# Altium PCB PowerPCB1.PcbDoc (part 1 of 2)
Units mm, origin at the board's own origin, x right, y up, seen from the top; angles counter-clockwise.
Board outline 99.06 x 99.06 mm, 2 copper layers (Top Layer, Bottom Layer); 136 components, 79 nets, 365 pads, 730 vias.
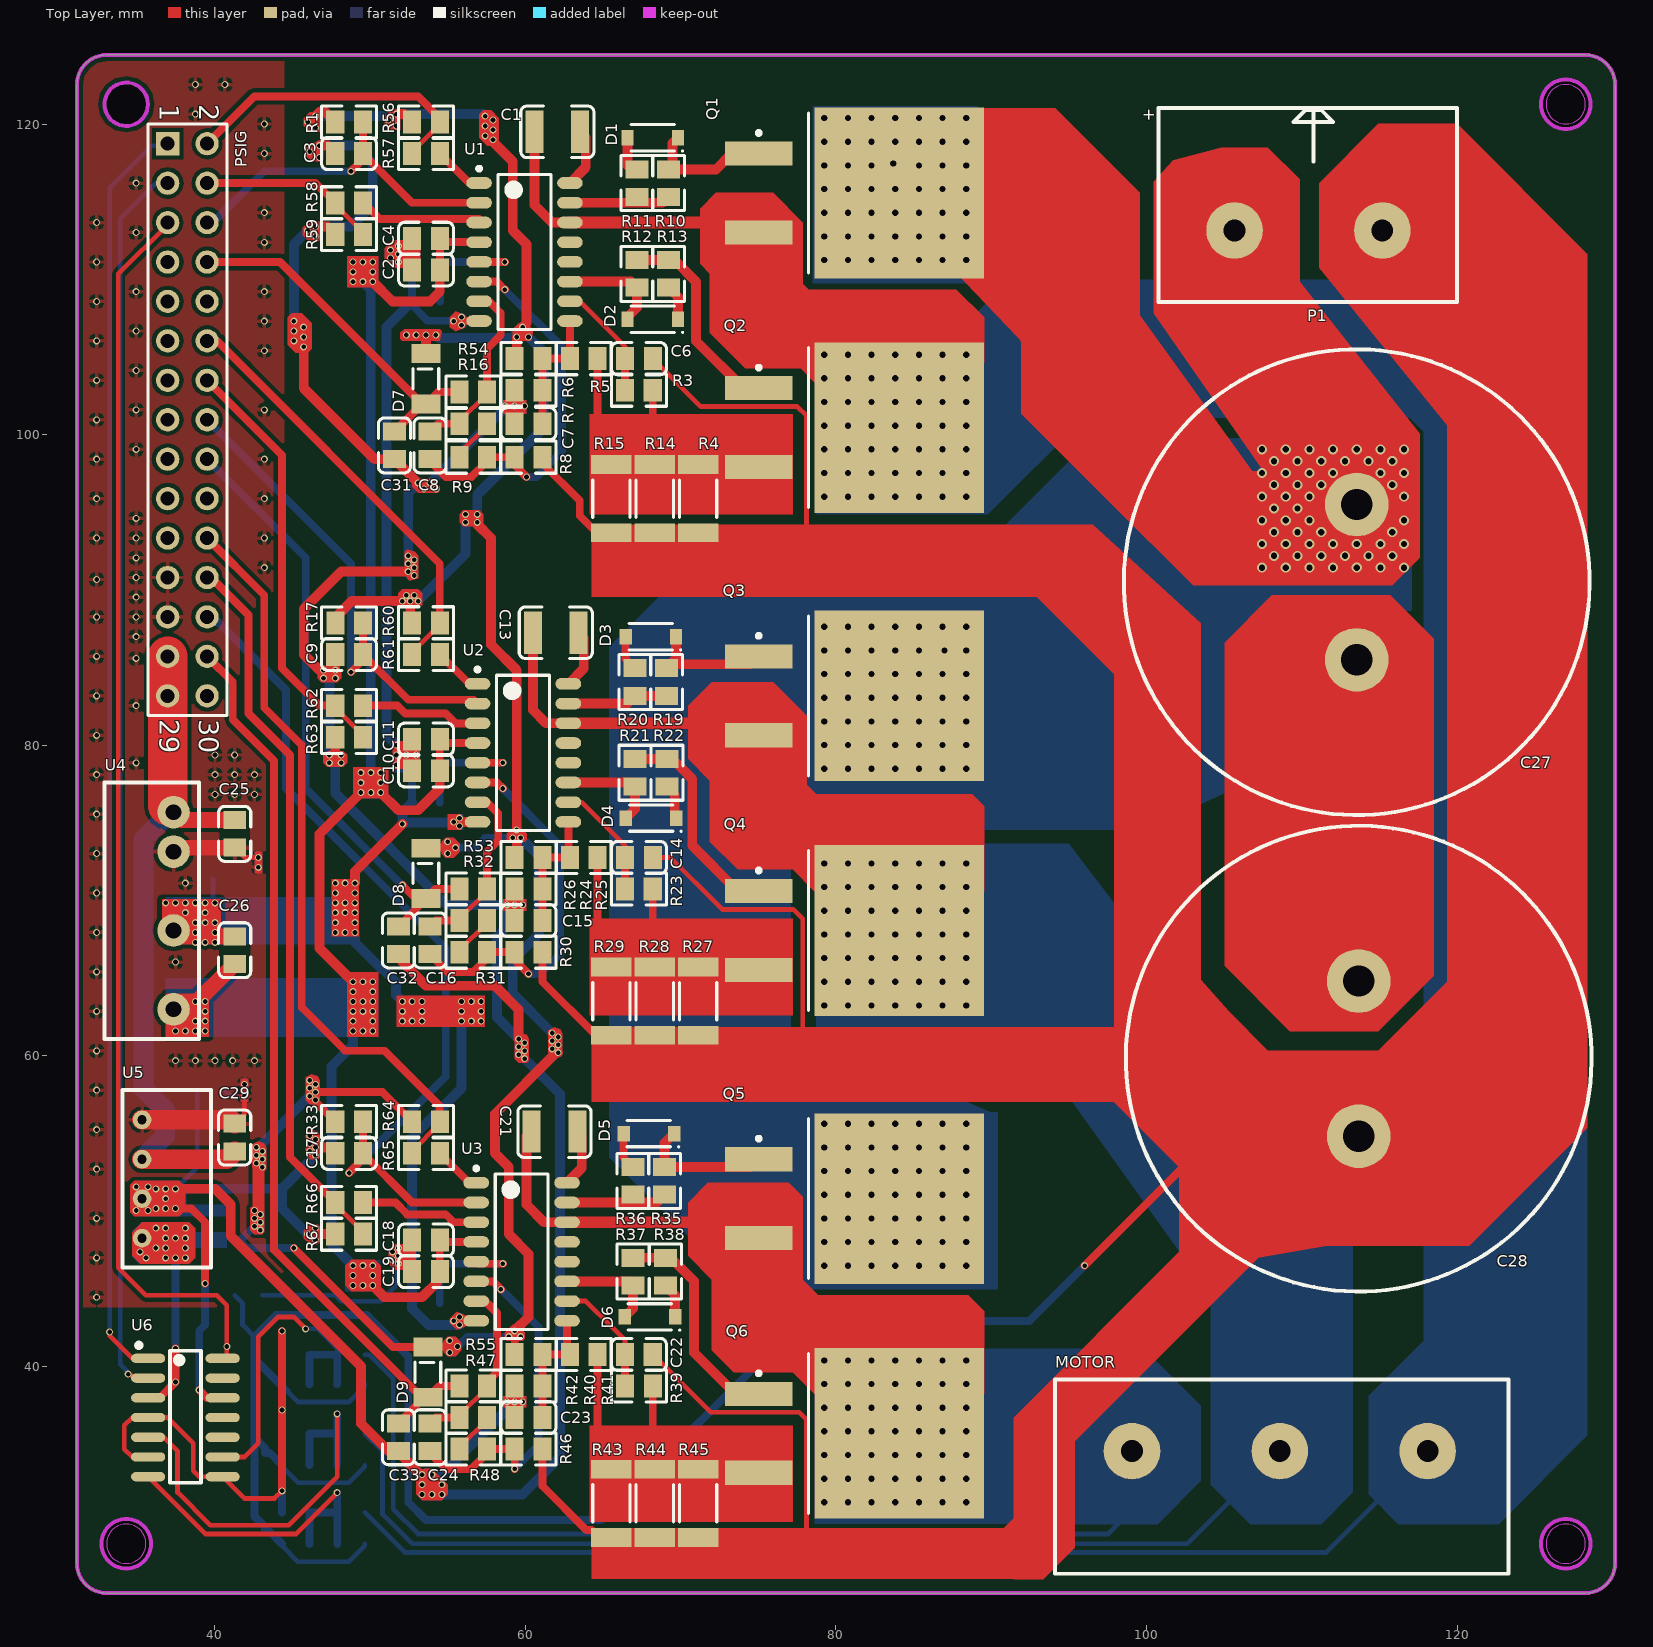
[diagram p0: Top Layer view]
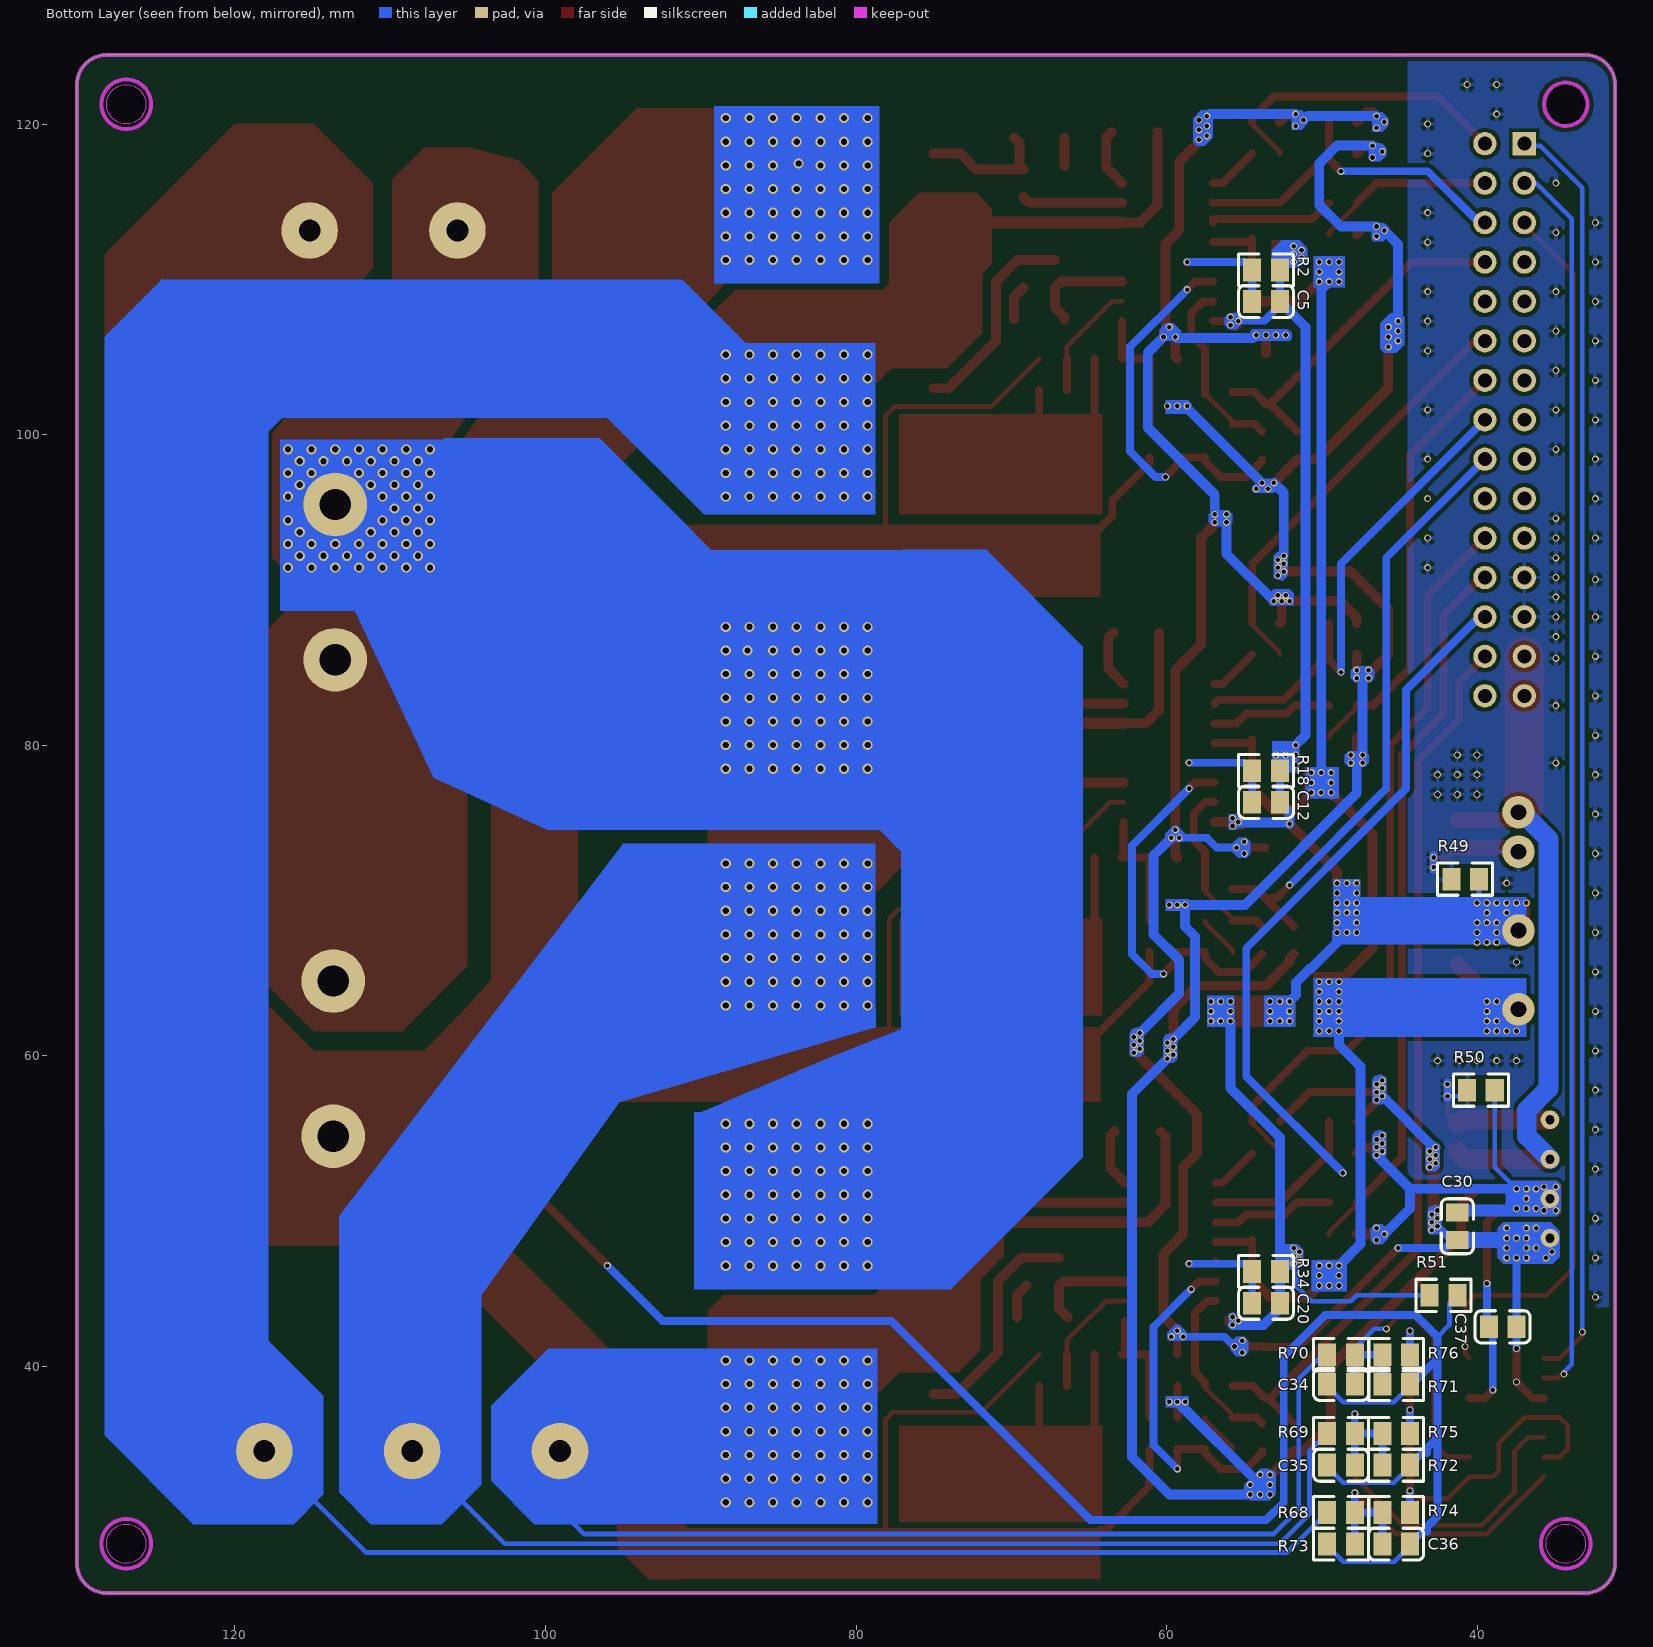
[diagram p1: Bottom Layer view, seen from below]
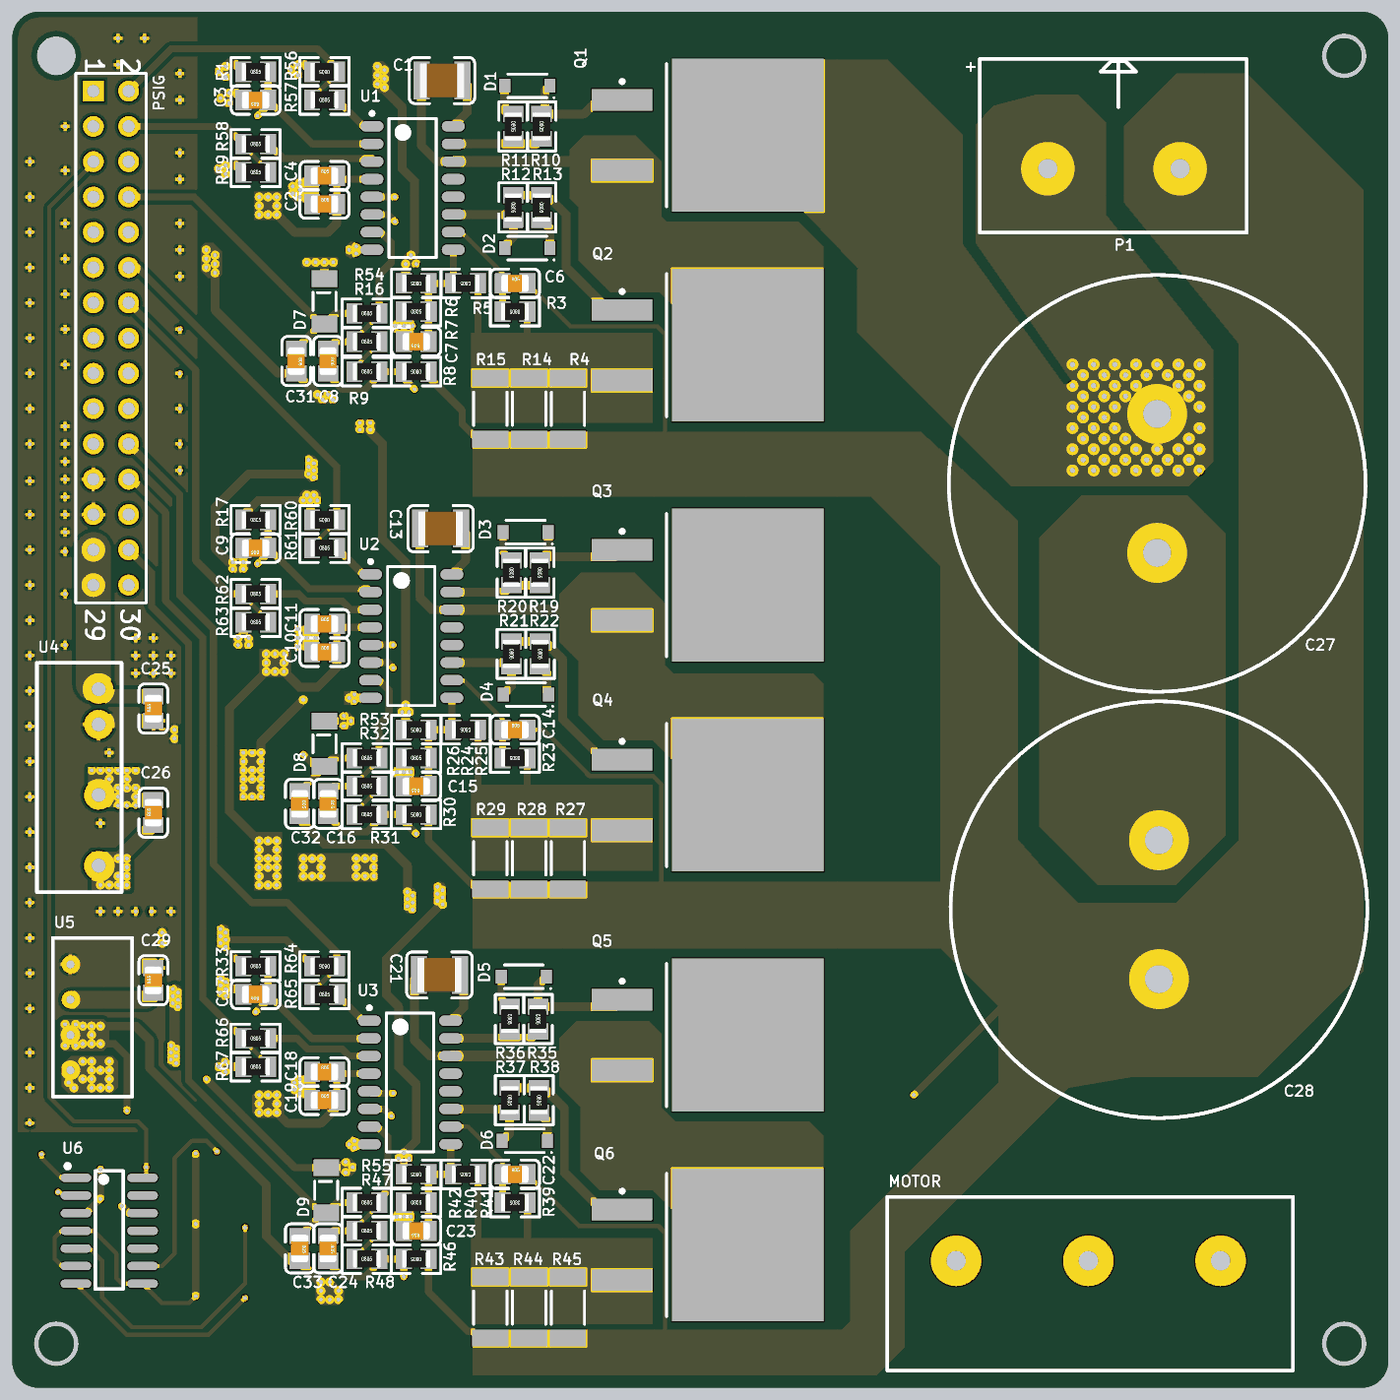
[diagram p3: 3D render of the assembled board from above, using the file's embedded part models]
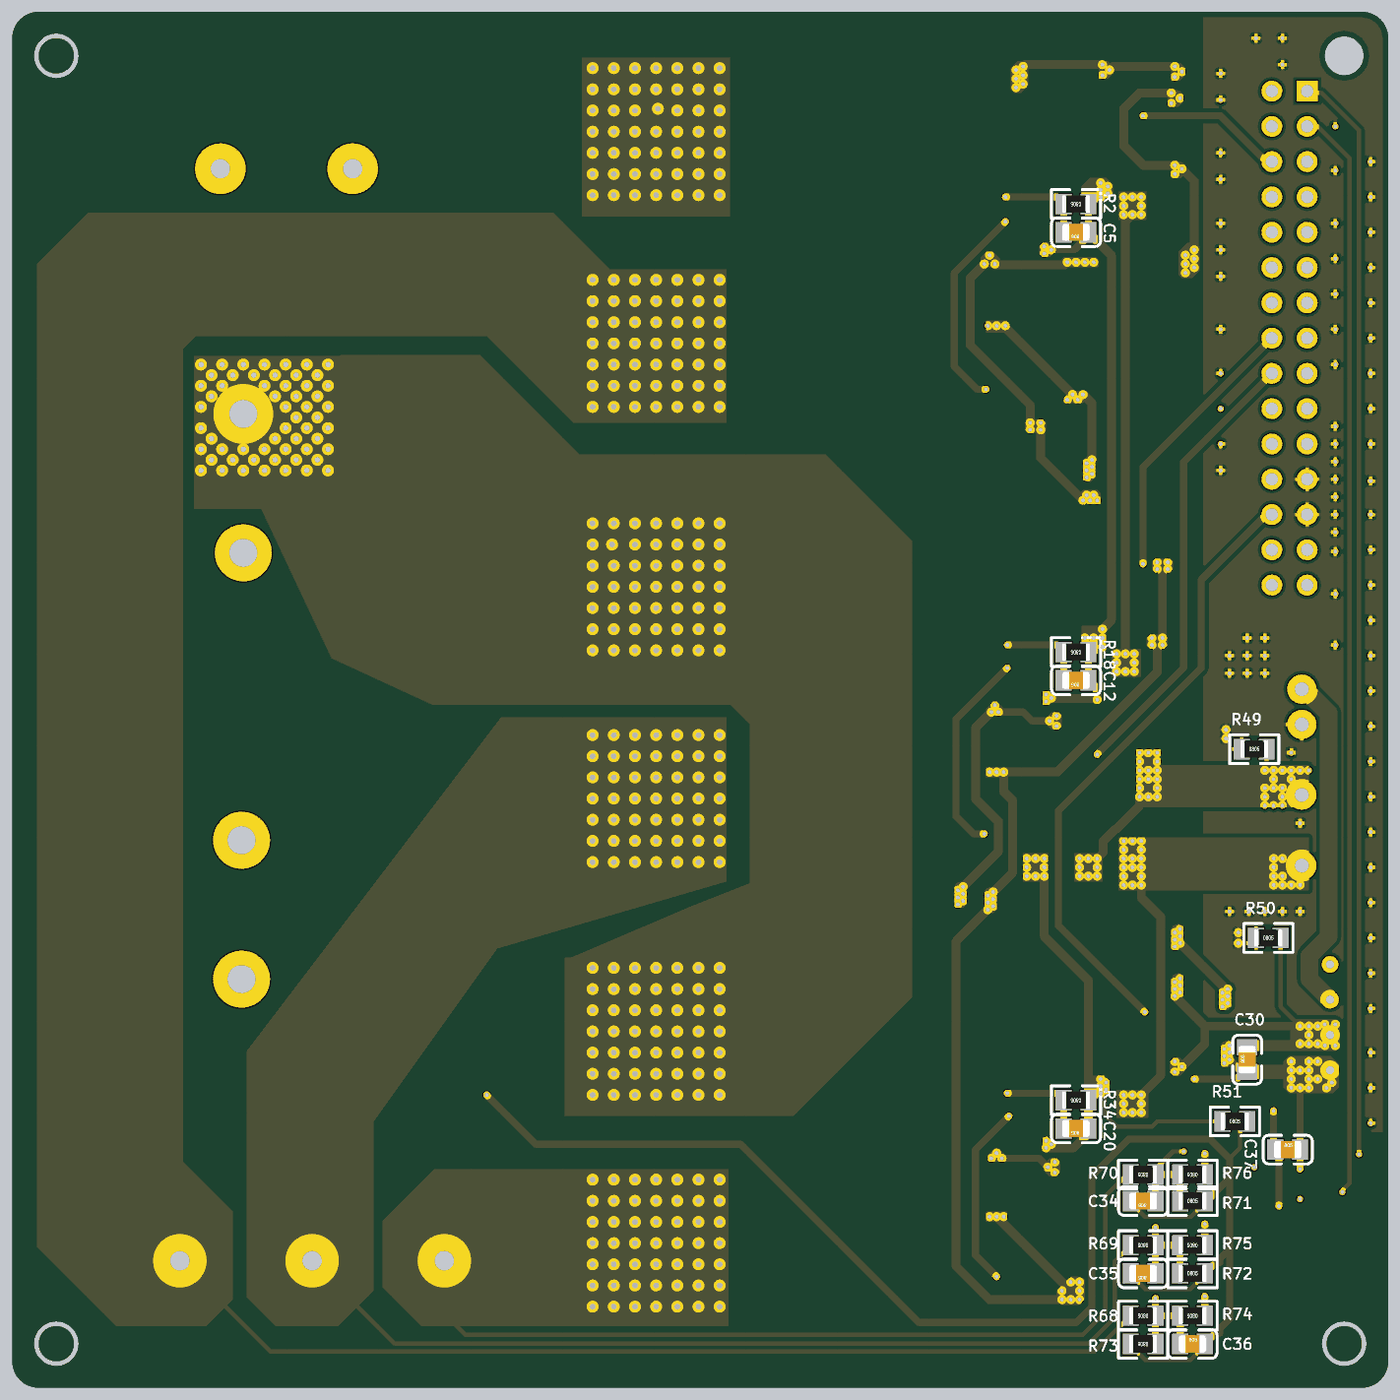
[diagram p4: 3D render of the assembled board from below, using the file's embedded part models]

## Layer stack, top to bottom
Top Solder: solder mask 0.0102, Solder Resist, Dk 3.5
Top Layer: signal copper 0.0356
Dielectric 1: dielectric 0.32, FR-4, Dk 4.8
Bottom Layer: signal copper 0.0356
Bottom Solder: solder mask 0.0102, Solder Resist, Dk 3.5

## Board outline
31.115,27.305 ccw(c33.02,27.305) 33.02,25.4 128.27,25.4 ccw(c128.27,27.305) 130.175,27.305 130.175,122.555 ccw(c128.27,122.555) 128.27,124.46 33.02,124.46 ccw(c33.02,122.555) 31.115,122.555
cut-out: 125.73,28.575 ccw(c127,28.575) 127,27.305 ccw(c127,28.575) 128.27,28.575 ccw(c127,28.575) 127,29.845 ccw(c127,28.575)
cut-out: 125.73,121.285 ccw(c127,121.285) 127,120.015 ccw(c127,121.285) 128.27,121.285 ccw(c127,121.285) 127,122.555 ccw(c127,121.285)
cut-out: 33.02,28.575 ccw(c34.29,28.575) 34.29,27.305 ccw(c34.29,28.575) 35.56,28.575 ccw(c34.29,28.575) 34.29,29.845 ccw(c34.29,28.575)
cut-out: 34.29,119.888 cw(c34.29,121.285) 32.893,121.285 cw(c34.29,121.285) 34.29,122.682 cw(c34.29,121.285) 35.687,121.285 cw(c34.29,121.285)
cut-out: 32.69,28.575 ccw(c34.29,28.575) 34.29,26.975 ccw(c34.29,28.575) 35.89,28.575 ccw(c34.29,28.575) 34.29,30.175 ccw(c34.29,28.575)
cut-out: 125.4,28.575 ccw(c127,28.575) 127,26.975 ccw(c127,28.575) 128.6,28.575 ccw(c127,28.575) 127,30.175 ccw(c127,28.575)
cut-out: 125.4,121.285 ccw(c127,121.285) 127,119.685 ccw(c127,121.285) 128.6,121.285 ccw(c127,121.285) 127,122.885 ccw(c127,121.285)

## Design rules (kind name [scope] priority, off if disabled: settings)
Clearance [All] p1: gap=0.254 ignorepadtopadclearanceinfootprint=FALSE except(0: Arc-Hole Track-Hole SMDPad-Hole THPad-Hole Via-Hole Fill-Hole Poly-Hole Region-Hole Text-Hole)
ComponentClearance [All] p1 off: gap=0.254 collisioncheckmode=3 verticalgap=0.254 showdistances=FALSE
PolygonConnect [All] p1: connectstyle=Relief reliefconductorwidth=0.254 reliefentries=4 polygonreliefangle="90 Angle" airgapwidth=0.254
RoutingVias [All] p1: holewidth=0.711 width=1.27 viastyle="Through Hole" minholewidth=0.711 minwidth=1.27 maxholewidth=0.711 maxwidth=1.27
SilkToSilkClearance [All] p1: silktosilkclearance=0
SilkToSolderMaskClearance [IsPad] p1: minsilkscreentomaskgap=0.127 clearancetoexposedcopper=TRUE
SolderMaskExpansion [All] p1: expansion=0.102
Width [All] p1: maxlimit=2.54 minlimit=0.254 preferedwidth=0.254
27 further rules are at their usual default settings.

## Components (designator, comment, footprint, x,y, rotation, side; value= is the part's Value field where it differs from the comment)
C1 "Cap Semi" LC-1210_C 62.054,119.507 r0 top value=100nF
C2 "Cap Semi" LC-0805_C 53.595,110.617 r0 top value=100nF
C3 "Cap Semi" LC-0805_C 48.64,118.11 r180 top value=22nF
C4 "Cap Semi" LC-0805_C 53.595,112.649 r0 top value=10uF
C5 "Cap Semi" LC-0805_C 53.595,108.585 r0 bottom value=100nF
C6 "Cap Semi" LC-0805_C 67.31,104.902 r0 top value=100nF
C7 "Cap Semi" LC-0805_C 60.197,100.711 r180 top value=33pF
C8 "Cap Semi" LC-0805_C 53.848,99.314 r270 top value=47pF
C9 "Cap Semi" LC-0805_C 48.64,85.852 r180 top value=22nF
C10 "Cap Semi" LC-0805_C 53.593,78.359 r0 top value=100nF
C11 "Cap Semi" LC-0805_C 53.594,80.391 r0 top value=10uF
C12 "Cap Semi" LC-0805_C 53.593,76.327 r0 bottom value=100nF
C13 "Cap Semi" LC-1210_C 61.953,87.249 r0 top value=100nF
C14 "Cap Semi" LC-0805_C 67.31,72.771 r0 top value=100nF
C15 "Cap Semi" LC-0805_C 60.197,68.707 r180 top value=33pF
C16 "Cap Semi" LC-0805_C 53.848,67.437 r270 top value=47pF
C17 "Cap Semi" LC-0805_C 48.64,53.721 r180 top value=22nF
C18 "Cap Semi" LC-0805_C 53.594,48.133 r0 top value=100nF
C19 "Cap Semi" LC-0805_C 53.594,46.101 r0 top value=10uF
C20 "Cap Semi" LC-0805_C 53.594,44.069 r0 bottom value=100nF
C21 "Cap Semi" LC-1210_C 61.867,55.118 r0 top value=100nF
C22 "Cap Semi" LC-0805_C 67.309,40.767 r0 top value=100nF
C23 "Cap Semi" LC-0805_C 60.197,36.703 r180 top value=33pF
C24 "Cap Semi" LC-0805_C 53.848,35.434 r270 top value=47pF
C25 "Cap Semi" LC-0805_C 41.275,74.296 r90 top value=10uF
C26 "Cap Semi" LC-0805_C 41.275,66.803 r90 top value=1uF
C27 "Cap Pol1" CAPACITORS 113.538,90.504 r270 top value=470uF
C28 "Cap Pol1" CAPACITORS 113.665,59.817 r270 top value=470uF
C29 "Cap Semi" LC-0805_C 41.275,54.736 r90 top value=4.7uF
C30 "Cap Semi" LC-0805_C 41.275,49.022 r90 bottom value=10uF
C31 "Cap Semi" LC-0805_C 51.562,99.314 r270 top value=22pF
C32 "Cap Semi" LC-0805_C 51.816,67.438 r270 top value=22pF
C33 "Cap Semi" LC-0805_C 51.816,35.434 r270 top value=22pF
C34 "Cap Semi" LC-0805_C 48.765,38.845 r0 bottom value=100nF
C35 "Cap Semi" LC-0805_C 48.767,33.638 r0 bottom value=100nF
C36 "Cap Semi" LC-0805_C 45.212,28.558 r180 bottom value=100nF
C37 "Cap Semi" LC-0805_C 38.354,42.545 r180 bottom value=100nF
D1 "1N4148W" SOD-123-D-IPC 68.199,119.126 r180 top
D2 "1N4148W" SOD-123-D-IPC 68.199,107.442 r180 top
D3 "1N4148W" SOD-123-D-IPC 68.072,86.995 r180 top
D4 "1N4148W" SOD-123-D-IPC 68.098,75.311 r180 top
D5 "1N4148W" SOD-123-D-IPC 67.945,54.991 r180 top
D6 "1N4148W" SOD-123-D-IPC 68.012,43.18 r180 top
D7 "D Schottky" MELF3416N 53.594,103.606 r90 top
D8 "D Schottky" MELF3416N 53.594,71.755 r90 top
D9 "D Schottky" MELF3416N 53.721,39.624 r90 top
MOTOR "Header 3" MKDS5/3-9.5 99.065,34.544 r0 top
P1 "DCBus" "MKDS5/2-9.5 - duplicate" 115.189,113.157 r180 top
PSIG "Header 15X2" HDR2X15 36.957,118.745 r270 top locked
Q1 "MOSFET-N" DPAK254P1525X450-3N-IPB60R080P7 81.174,115.57 r0 top
Q2 "MOSFET-N" DPAK254P1525X450-3N-IPB60R080P7 81.174,100.457 r0 top
Q3 "MOSFET-N" DPAK254P1525X450-3N-IPB60R080P7 81.174,83.185 r0 top
Q4 "MOSFET-N" DPAK254P1525X450-3N-IPB60R080P7 81.174,68.072 r0 top
Q5 "MOSFET-N" DPAK254P1525X450-3N-IPB60R080P7 81.174,50.8 r0 top
Q6 "MOSFET-N" DPAK254P1525X450-3N-IPB60R080P7 81.174,35.687 r0 top
R1 "Res3" LC-0805_R 48.64,120.132 r0 top value=10K
R2 "Res3" LC-0805_R 53.595,110.617 r0 bottom value=47K
R3 "Res3" LC-0805_R 67.309,102.87 r180 top value=1K
R4 "Res3" 12Z-2010 71.12,95.885 r270 top value=0.05R
R5 "Res3" LC-0805_R 63.753,104.902 r180 top value=910R
R6 "Res3" LC-0805_R 60.197,104.902 r180 top value=4.7K
R7 "Res3" LC-0805_R 60.199,102.87 r0 top value=910R
R8 "Res3" LC-0805_R 60.197,98.552 r180 top value=1K
R9 "Res3" LC-0805_R 56.641,98.552 r0 top value=2.7K
R10 "Res3" LC-0805_R 69.215,116.204 r270 top value=75R
R11 "Res3" LC-0805_R 67.183,116.204 r270 top value=22R
R12 "Res3" LC-0805_R 67.183,110.364 r270 top value=75R
R13 "Res3" LC-0805_R 69.215,110.363 r270 top value=22R
R14 "Res3" 12Z-2010 68.326,95.885 r270 top value=0.05R
R15 "Res3" 12Z-2010 65.532,95.885 r270 top value=0.05R
R16 "Res3" LC-0805_R 56.641,100.711 r0 top value=2.7K
R17 "Res3" LC-0805_R 48.642,87.874 r0 top value=10K
R18 "Res3" LC-0805_R 53.593,78.359 r0 bottom value=47K
R19 "Res3" LC-0805_R 69.088,84.075 r270 top value=75R
R20 "Res3" LC-0805_R 67.056,84.075 r270 top value=22R
R21 "Res3" LC-0805_R 67.056,78.233 r270 top value=75R
R22 "Res3" LC-0805_R 69.114,78.231 r270 top value=22R
R23 "Res3" LC-0805_R 67.309,70.739 r180 top value=1K
R24 "Res3" LC-0805_R 60.198,72.771 r180 top value=4.7K
R25 "Res3" LC-0805_R 63.753,72.771 r180 top value=910R
R26 "Res3" LC-0805_R 60.198,70.739 r0 top value=910R
R27 "Res3" 12Z-2010 71.12,63.519 r270 top value=0.05R
R28 "Res3" 12Z-2010 68.326,63.519 r270 top value=0.05R
R29 "Res3" 12Z-2010 65.532,63.519 r270 top value=0.05R
R30 "Res3" LC-0805_R 60.197,66.675 r180 top value=1K
R31 "Res3" LC-0805_R 56.641,66.675 r0 top value=2.7K
R32 "Res3" LC-0805_R 56.641,68.707 r0 top value=2.7K
R33 "Res3" LC-0805_R 48.64,55.753 r0 top value=10K
R34 "Res3" LC-0805_R 53.594,46.101 r0 bottom value=47K
R35 "Res3" LC-0805_R 68.961,51.944 r270 top value=75R
R36 "Res3" LC-0805_R 66.929,51.944 r270 top value=22R
R37 "Res3" LC-0805_R 66.929,46.102 r270 top value=75R
R38 "Res3" LC-0805_R 69.028,46.1 r270 top value=22R
R39 "Res3" LC-0805_R 67.311,38.735 r180 top value=1K
R40 "Res3" LC-0805_R 60.198,40.767 r180 top value=4.7K
R41 "Res3" LC-0805_R 63.753,40.767 r180 top value=910R
R42 "Res3" LC-0805_R 60.197,38.735 r0 top value=910R
R43 "Res3" 12Z-2010 65.532,31.175 r270 top value=0.05R
R44 "Res3" 12Z-2010 68.326,31.175 r270 top value=0.05R
R45 "Res3" 12Z-2010 71.12,31.175 r270 top value=0.05R
R46 "Res3" LC-0805_R 60.197,34.671 r180 top value=1K
R47 "Res3" LC-0805_R 56.641,36.703 r0 top value=2.7K
R48 "Res3" LC-0805_R 56.642,34.671 r0 top value=2.7K
R49 "Res3" LC-0805_R 40.767,71.374 r180 bottom value=0R
R50 "Res3" LC-0805_R 39.752,57.785 r180 bottom value=0R
R51 "Res3" LC-0805_R 42.164,44.577 r180 bottom value=0R
R53 "Res3" LC-0805_R 56.641,70.739 r0 top value=1K
R54 "Res3" LC-0805_R 56.641,102.743 r0 top value=1K
R55 "Res3" LC-0805_R 56.641,38.735 r0 top value=1K
R56 "Res3" LC-0805_R 53.595,120.132 r180 top value=100K
R57 "Res3" LC-0805_R 53.595,118.11 r0 top value=1K
R58 "Res3" LC-0805_R 48.64,114.935 r0 top value=1K
R59 "Res3" LC-0805_R 48.64,112.903 r0 top value=3.3K
R60 "Res3" LC-0805_R 53.594,87.884 r180 top value=100K
R61 "Res3" LC-0805_R 53.594,85.852 r0 top value=1K
R62 "Res3" LC-0805_R 48.64,82.55 r0 top value=1K
R63 "Res3" LC-0805_R 48.64,80.518 r0 top value=3.3K
R64 "Res3" LC-0805_R 53.594,55.753 r180 top value=100K
R65 "Res3" LC-0805_R 53.594,53.721 r0 top value=1K
R66 "Res3" LC-0805_R 48.64,50.546 r0 top value=1K
R67 "Res3" LC-0805_R 48.64,48.514 r0 top value=3.3K
R68 "Res3" LC-0805_R 48.766,30.59 r0 bottom value=82K
R69 "Res3" LC-0805_R 48.767,35.67 r0 bottom value=82K
R70 "Res3" LC-0805_R 48.766,40.75 r0 bottom value=82K
R71 "Res3" LC-0805_R 45.209,38.845 r180 bottom value=1.5K
R72 "Res3" LC-0805_R 45.211,33.638 r180 bottom value=1.5K
R73 "Res3" LC-0805_R 48.768,28.558 r0 bottom value=1.5K
R74 "Res3" LC-0805_R 45.21,30.59 r0 bottom value=82K
R75 "Res3" LC-0805_R 45.211,35.67 r0 bottom value=82K
R76 "Res3" LC-0805_R 45.209,40.75 r0 bottom value=82K
U1 "L6390" SOIC127P660X175-16N 59.94,111.768 r0 top
U2 "L6390" SOIC127P660X175-16N 59.839,79.51 r0 top
U3 "L6390" SOIC127P660X175-16N 59.753,47.379 r0 top
U4 "05-15" ZY0515IB/FS-1W 37.338,75.692 r270 top
U5 "05-3V3" NN1-05S3V3A 35.306,55.88 r270 top
U6 "LM2901DR" LC-SOIC-14_150mil 38.1,36.703 r270 top

## Footprints (in the part's own frame and the unit in brackets; to place one, negate y for a bottom-side part, rotate by r counter-clockwise, add the part's x,y. Pads: shape width x height; smd on the part's side, far side on the other; paste and mask are expansions set on the pad)
12Z-2010 [mm] "Chip Resistor, Body 5.0x2.5mm, IPC High Density"
  rect 1.2x2.6 smd: 1(-2.2,0) 2(2.2,0)
  silkscreen extent -1.2,-1.2 1.2,1.2, body extent -2.58,-1.33 2.58,1.33, height 0.9
CAPACITORS [mm] "470uF 250V 30x30"
  round 4.1 hole 2.02: 1(-5,0) 2(5,0)
  silkscreen extent -15,-15 15,15
DPAK254P1525X450-3N-IPB60R080P7 [mm] "D2-PAK, 3-Pads, Body 7.75x8.51mm (max), IPC Medium Density"
  rect 10.9x11 smd: D(2.9,0)
  rect 4.35x1.55 smd: G(-6.15,2.54) S(-6.15,-2.54)
  silkscreen extent -6.27,-5.15 -2.95,5.15, body extent -2.35,-5.15 6.95,5.15, height 4.5
HDR2X15 [mm] "Connector; Header; 15x2 Position"
  rect 1.5x1.5 hole 0.9: 1(0,0)
  round 1.5 hole 0.9: 2(0,2.54) 3(2.54,0) 4(2.54,2.54) 5(5.08,0) 6(5.08,2.54) 7(7.62,0) 8(7.62,2.54) 9(10.16,0) 10(10.16,2.54) 11(12.7,0) 12(12.7,2.54) 13(15.24,0) 14(15.24,2.54) 15(17.78,0) 16(17.78,2.54) 17(20.32,0) 18(20.32,2.54) 19(22.86,0) 20(22.86,2.54) 21(25.4,0) 22(25.4,2.54) 23(27.94,0) 24(27.94,2.54) 25(30.48,0) 26(30.48,2.54) 27(33.02,0) 28(33.02,2.54) 29(35.56,0) 30(35.56,2.54)
  silkscreen extent -1.27,-1.27 36.83,3.81
LC-0805_C [mm]
  rect 1.16x1.47 smd: 1(-0.89,0) 2(0.89,0)
  silkscreen extent -1.77,-1.04 1.77,1.04, body extent -1,-0.62 1,0.63, height 0.77
LC-0805_R [mm]
  rect 1.16x1.47 smd: 1(-0.89,0) 2(0.89,0)
  silkscreen extent -1.77,-1.04 1.77,1.03, body extent -1,-0.62 1,0.63, height 0.49
LC-1210_C [mm]
  rect 1.16x2.72 smd: 1(-1.475,0) 2(1.475,0)
  silkscreen extent -2.36,-1.66 2.35,1.66, body extent -1.6,-1.25 1.6,1.25, height 1.3
LC-SOIC-14_150mil [mm]
  oval 0.6x2.2 smd: 1(-3.81,-2.4) 2(-2.54,-2.4) 3(-1.27,-2.4) 4(0,-2.4) 5(1.27,-2.4) 6(2.54,-2.4) 7(3.81,-2.4) 8(3.81,2.4) 9(2.54,2.4) 10(1.27,2.4) 11(0,2.4) 12(-1.27,2.4) 13(-2.54,2.4) 14(-3.81,2.4)
  silkscreen extent -4.8,-3.15 4.2,1
MELF3416N [mm] ", 2-Leads, Body 3.45x1.60mm, IPC Medium Density"
  rect 1.2x1.85 smd: 1(-1.625,0) 2(1.625,0)
  silkscreen extent -0.65,-0.82 0.65,0.82, body extent -1.8,-0.81 1.8,0.81, height 1.61
"MKDS5/2-9.5 - duplicate" [mm] "MKDS 5/ 2-9,5 - 1714971"
  round 3.64 hole 1.4: 1(0,0) 2(9.52,0)
  silkscreen extent -4.8,-7.9 14.42,4.6
MKDS5/3-9.5 [mm] "MKDS 5/ 3-9,5 - 1714971"
  round 3.64 hole 1.4: 1(19.04,0) 2(9.52,0) 3(0,0)
  silkscreen extent -4.95,-7.9 24.26,4.6
NN1-05S3V3A [mm] "DC/DC NN1-05S3V3A"
  round 1.2 hole 0.6: 1(0,0) 2(2.54,0) 3(5.08,0) 4(7.62,0)
  silkscreen extent -1.91,-1.27 9.53,4.45
SOD-123-D-IPC [mm] "Molded Diode, 2-Leads, Body 2.70x1.60mm, IPC Medium Density"
  rect 0.8x1 smd: 1(1.625,0) 2(-1.625,0)
  silkscreen extent -1.97,-0.85 1.4,0.9, body extent -1.4,-0.85 1.4,0.85, height 1.25
SOIC127P660X175-16N [mm] "SOIC, 16-Leads, Body 9.90x4.10mm, Pitch 1.27mm, IPC Medium Density"
  oval 1.65x0.75 smd: 1(-2.925,4.445) 2(-2.925,3.175) 3(-2.925,1.905) 4(-2.925,0.635) 5(-2.925,-0.635) 6(-2.925,-1.905) 7(-2.925,-3.175) 8(-2.925,-4.445) 9(2.925,-4.445) 10(2.925,-3.175) 11(2.925,-1.905) 12(2.925,-0.635) 13(2.925,0.635) 14(2.925,1.905) 15(2.925,3.175) 16(2.925,4.445)
  silkscreen extent -3.05,-5 1.7,5.49, body extent -2.1,-5 2.1,5, height 1.75
ZY0515IB/FS-1W [mm]
  round 2.1 hole 1.01: 1(0,0) 2(2.54,0) 4(7.62,0) 6(12.7,0)
  silkscreen extent -1.91,-4.44 14.6,1.65

## Part data
C1 C2 C3 C4 C5 C6 C7 C8 C9 C10 C11 C12 C13 C14 C15 C16 C17 C18 C19 C20 C21 C22 C23 C24 C25 C26 C29 C30 C31 C32 C33 C34 C35 C36 C37: "Capacitor (Semiconductor SIM Model)", LatestRevisionDate=29-May-2009, LatestRevisionNote="IPC-7351 Footprint Added.", PackageDescription="Chip Capacitor", PackageReference=C1206, Published=8-Jun-2000, Publisher="Altium Limited"
C27 C28: "Polarized Capacitor (Radial)", Voltage=250V, LatestRevisionDate=17-Jul-2002, LatestRevisionNote="Re-released for DXP Platform.", PackageDescription="Polarized Capacitor (Radial); 2 Leads", PackageReference=RB7.6-15, Published=8-Jun-2000, Publisher="Altium Limited"
D1 D2 D3 D4 D5 D6: library part 1N4148, "1N4148WS"
D7 D8 D9: "TMMBAT48FILM"
MOTOR: "Header, 3-Pin", LatestRevisionDate=17-Jul-2002, LatestRevisionNote="Re-released for DXP Platform.", Publisher="Altium Limited"
P1: library part "Header 2", "Header, 2-Pin", LatestRevisionDate=17-Jul-2002, LatestRevisionNote="Re-released for DXP Platform.", Publisher="Altium Limited"
PSIG: "Header, 15-Pin, Dual row", LatestRevisionDate=17-Jul-2002, LatestRevisionNote="Re-released for DXP Platform.", Publisher="Altium Limited"
Q1 Q2 Q3 Q4 Q5 Q6: "IPB60R080P7"
R1 R2 R3 R5 R6 R7 R8 R9 R10 R11 R12 R13 R16 R17 R18 R19 R20 R21 R22 R23 R24 R25 R26 R30 R31 R32 R33 R34 R35 R36 R37 R38 R39 R40 R41 R42 R46 R47 R48 R49 R50 R51 R53 R54 R55 R56 R57 R58 R59 R60 R61 R62 R63 R64 R65 R66 R67 R68 R69 R70 R71 R72 R73 R74 R75 R76: "Resistor", LatestRevisionDate=29-May-2009, LatestRevisionNote="IPC-7351 Footprint Added.", PackageDescription="Chip Resistor", PackageReference=J1-0603, Published=8-Jun-2000, Publisher="Altium Limited"
R4 R14 R15 R27 R28 R29 R43 R44 R45: "Resistor", Power=2W, LatestRevisionDate=29-May-2009, LatestRevisionNote="IPC-7351 Footprint Added.", PackageDescription="Chip Resistor", PackageReference=J1-0603, Precision=1%, Published=8-Jun-2000, Publisher="Altium Limited"
U1 U2 U3: "ST High voltage high/low-side driver"
U4: library part ZY0515IB/FS-1W, "ZY0515IB/FS-1W"
U5: library part NN1-05S3V3A, "NN1-05S3V3A DC/DC"
U6: "QUAD DIFFERENTIAL COMPARATORS"

## Via types
v1: diameter 0.45, hole 0.3, Top Layer to Bottom Layer, 379 vias
v2: diameter 0.65, hole 0.4, Top Layer to Bottom Layer, 351 vias

## Nets (pads, with @x,y where several pads share a name; then routed paths per layer and width w, separated by ;. In a path a pad name is that pad's centre, name@x,y a point inside that pad or via, vN(x,y) a via of type N, cw(c..) or ccw(c..) an arc to the next point about the centre after c; other vN are vias at no path point)
COMP_A: PSIG.1 U6.1 | length 81.9
  Top Layer w0.305: v1(33.223,42.215) 33.223,41.961 34.671,40.513 U6.1@35.7,40.513
  Bottom Layer w0.305: v1(33.223,42.215) 33.223,115.9 35.941,118.618 PSIG.1@36.957,118.618
COMP_B: PSIG.3 U6.2 | length 80
  Top Layer w0.305: v1(34.417,39.497) 34.544,39.497 34.798,39.243 U6.2@35.7,39.243
  Bottom Layer w0.305: v1(34.417,39.497) 34.417,39.624 33.909,40.132 33.909,113.919 36.195,116.205 PSIG.3@36.957,116.205
COMP_C: PSIG.5 U6.14 | length 80.1
  Top Layer w0.305: PSIG.5@36.957,113.665 36.957,113.538 33.782,110.363 33.782,46.355 35.56,44.577 40.132,44.577 40.767,43.942 v1(40.767,41.275) 40.767,40.78 U6.14@40.5,40.513
CURRENTA: C31.1 D7.1 PSIG.8 R54.1 | length 22.9
  Top Layer w0.508: PSIG.8@39.497,111.125 44.195,111.125 D7.1@53.339,101.981 ; C31.1@51.562,100.204 D7.1@53.339,101.981 ; R54.1@55.751,102.743 54.356,102.743 D7.1@53.594,101.981 D7.1@53.339,101.981
CURRENTB: C32.1 D8.1 PSIG.18 R53.1 | length 39.5
  Top Layer w0.508: C32.1@51.816,68.328 52.605,69.117 52.903,69.415 53.594,70.106 D8.1@53.594,70.13 ; v1(52.07,70.993) 52.933,70.13 D8.1@53.594,70.13 ; R53.1@55.751,70.739 54.203,70.739 D8.1@53.594,70.13
  Bottom Layer w0.508: PSIG.18@39.497,98.425 45.847,92.075 45.847,77.216 v1(52.07,70.993)
CURRENTC: C33.1 D9.1 PSIG.28 R55.1 | length 58.6
  Top Layer w0.508: PSIG.28@39.497,85.725 41.148,84.074 41.148,81.661 43.815,78.994 43.815,47.498 53.314,37.999 D9.1@53.49,37.999 ; C33.1@51.816,36.324 C33.1@51.816,36.324 D9.1@53.49,37.999 ; R55.1@55.751,38.735 54.457,38.735 D9.1@53.721,37.999 D9.1@53.49,37.999
DGND: C2.1 C4.1 C5.1 C10.1 C11.1 C12.1 C18.1 C19.1 C20.1 C26.2 R2.1 R18.1 R34.1 R49.2 R51.1 U1.8 U2.8 U3.8 U4.4 | length 97.6
  Top Layer w0.508: C19.1@52.704,46.101 C18.1@52.704,48.133 ; 55.761,107.323 U1.8@57.015,107.323
  Top Layer w0.635: v1(49.022,71.12) 49.022,71.882 v1(52.07,74.93) ; v1(55.372,75.057) 55.38,75.065 U2.8@56.914,75.065
  Top Layer w1.016: U4.4@37.338,68.072 37.717,67.693 40.005,67.693 C26.2@41.275,67.693
  Bottom Layer w0.305: R49.2@39.877,71.374 39.877,69.978 v1(40.005,69.85) ; R51.1@43.054,44.577 47.752,44.577 48.133,44.196 50.673,44.196 51.562,45.085 51.562,46.355 v1(51.816,46.609)
  Bottom Layer w0.508: C12.1@52.703,76.327 R18.1@52.703,78.359 ; 52.705,79.629 v1(52.959,79.375) ; R2.1@52.705,110.617 C5.1@52.705,108.585 52.705,108.332 53.695,107.342 55.345,107.342 v1(55.372,107.315)
  Bottom Layer w0.635: v1(49.022,67.945) 49.022,67.31 50.736,65.596 50.783,65.596 51.654,64.724 51.654,63.916 v1(52.07,63.5) ; v1(51.689,80.01) 51.054,80.645 51.054,106.934 C5.1@52.705,108.585 ; C12.1@52.703,76.327 52.07,75.694 v1(52.07,74.93) 52.161,75.021 55.336,75.021 v1(55.372,75.057) ; v1(55.753,42.672) 53.758,42.672 52.704,43.726 C20.1@52.704,44.069 R34.1@52.704,46.101 52.704,54.736 55.88,57.912 v1(55.88,62.23)
  other v1: 55.372,42.926 55.753,43.18 51.435,46.863 51.816,47.117 51.435,47.371 51.816,47.625 52.07,62.23 52.705,62.23 53.34,62.23 56.515,62.23 57.15,62.23 52.07,62.865 53.34,62.865 55.88,62.865 57.15,62.865 52.705,63.5 53.34,63.5 55.88,63.5 56.515,63.5 57.15,63.5 38.735,67.31 39.37,67.31 40.005,67.31 38.735,67.945 40.005,67.945 47.752,67.945 48.387,67.945 38.735,68.58 39.37,68.58 40.005,68.58 47.752,68.58 49.022,68.58 38.1,69.215 39.37,69.215 47.752,69.215 48.387,69.215 49.022,69.215 36.83,69.85 37.465,69.85 38.1,69.85 38.735,69.85 39.37,69.85 47.752,69.85 48.387,69.85 49.022,69.85 47.752,70.485 49.022,70.485 47.752,71.12 48.387,71.12 55.753,74.803 55.753,75.311 51.689,78.74 51.689,79.375 52.324,79.375 55.88,107.061 55.88,107.569 51.816,111.125 51.308,111.379 51.816,111.633 51.308,111.887 51.816,112.141
DVCC: C2.2 C4.2 C10.2 C11.2 C18.2 C19.2 C26.1 U1.4 U2.4 U3.4 U4.6 | length 101.4
  Top Layer w0.508: C10.2@54.483,78.359 C10.2@54.483,78.359 C11.2@54.484,80.391 54.73,80.145 U2.4@56.914,80.145 ; C19.2@54.484,46.101 C18.2@54.484,48.133 54.603,48.014 U3.4@56.828,48.014 ; C2.2@54.485,110.617 C4.2@54.485,112.649 54.731,112.403 U1.4@57.015,112.403
  Top Layer w0.635: v1(48.895,64.77) 46.736,66.929 46.736,74.295 v1(49.403,76.962) ; v1(49.53,109.855) v1(50.165,109.855) 51.435,108.585 53.721,108.585 ; v1(50.165,45.212) 50.927,44.45 53.34,44.45 54.356,45.466 54.356,45.973 C19.2@54.484,46.101 ; v1(50.673,76.962) 51.816,75.819 53.086,75.819 54.483,77.216 C10.2@54.483,78.359 ; 53.848,108.585 54.485,109.222 C2.2@54.485,110.617
  Top Layer w1.016: U4.6@37.338,62.992 38.354,62.992 C26.1@41.275,65.913
  Bottom Layer w0.635: v1(48.895,46.482) 47.498,47.879 47.498,59.309 48.895,60.706 v1(48.895,61.595) ; v1@49.403,76.835 50.038,77.47 v1(50.038,78.232) 50.038,109.347 v1(49.53,109.855)
  other v1: 48.895,45.212 49.53,45.212 48.895,45.847 50.165,45.847 49.53,46.482 50.165,46.482 37.465,61.595 38.1,61.595 38.735,61.595 39.37,61.595 49.53,61.595 50.165,61.595 38.735,62.23 39.37,62.23 48.895,62.23 50.165,62.23 39.37,62.865 48.895,62.865 49.53,62.865 50.165,62.865 38.735,63.5 39.37,63.5 48.895,63.5 49.53,63.5 50.165,63.5 48.895,64.135 50.165,64.135 49.53,64.77 50.165,64.77 50.038,76.962 49.403,77.597 50.673,77.597 49.403,78.232 50.673,78.232 48.895,109.855 48.895,110.49 50.165,110.49 48.895,111.125 49.53,111.125 50.165,111.125
GND: C25.1 C29.2 PSIG.23 PSIG.25 R49.1 R50.1 U4.2 U5.1 | length 15.4
  Top Layer w0.305: C29.2@41.275,55.626 41.91,56.261 v1(41.91,57.404) ; C25.1@41.275,73.406 41.91,72.771 v1(42.799,72.771)
  Top Layer w1.016: U4.2@37.338,73.152 37.592,73.406 C25.1@41.275,73.406
  Top Layer w1.27: U5.1@35.306,55.88 41.021,55.88 C29.2@41.275,55.626
  Bottom Layer w0.305: R50.1@40.642,57.785 41.023,57.404 v1(41.91,57.404)
  other v1: 32.385,44.45 32.385,46.99 32.385,49.53 32.385,52.705 32.385,55.245 32.385,57.785 41.91,58.166 37.465,59.69 38.735,59.69 40.005,59.69 41.148,59.69 42.545,59.69 32.385,60.325 32.385,62.865 32.385,65.405 37.465,66.04 32.385,67.945 32.385,70.485 38.1,71.12 42.799,72.136 32.385,73.025 32.385,75.565 40.005,76.835 41.275,76.835 42.545,76.835 32.385,78.105 40.005,78.105 41.275,78.105 42.545,78.105 34.925,78.867 40.005,79.375 41.275,79.375 32.385,80.645 34.925,82.55 32.385,83.185 34.925,85.598 32.385,85.725 34.925,86.995 32.385,88.265 34.925,88.265 34.925,89.535 32.385,90.678 34.925,90.805 43.18,91.44 34.925,92.075 32.385,93.345 34.925,93.345 43.18,93.345 34.925,94.615 32.385,95.885 43.18,95.885 32.385,98.425 43.18,98.425 34.925,99.06 32.385,100.965 34.925,101.6 43.18,101.6 32.385,103.505 34.925,104.14 43.18,105.41 32.385,106.045 34.925,106.68 43.18,107.315 32.385,108.585 34.925,109.22 43.18,109.22 32.385,111.125 43.18,112.395 34.925,113.03 32.385,113.665 43.18,114.3 34.925,116.205 43.18,118.11 43.18,120.015 38.735,120.65 38.735,122.555 40.64,122.555
HINA: PSIG.4 R58.1 R59.2 | length 11.5
  Top Layer w0.305: R58.1@47.75,114.935 47.75,114.825 49.53,113.045 R59.2@49.53,112.903
  Top Layer w0.508: PSIG.4@39.497,116.205 46.48,116.205 R58.1@47.75,114.935
HINB: PSIG.14 R62.1 R63.2 | length 27.7
  Top Layer w0.305: R62.1@47.75,82.55 47.75,82.425 49.53,80.645 R63.2@49.53,80.518
  Top Layer w0.508: PSIG.14@39.497,103.505 44.323,98.679 44.323,84.963 46.736,82.55 R62.1@47.75,82.55
HINC: PSIG.24 R66.1 R67.2 | length 46.6
  Top Layer w0.305: R66.1@47.75,50.546 47.75,50.436 49.53,48.656 R67.2@49.53,48.514
  Top Layer w0.508: PSIG.24@39.497,90.805 39.751,90.805 42.164,88.392 42.164,82.042 44.831,79.375 44.831,53.465 R66.1@47.75,50.546
IN_5V: C25.2 C29.1 PSIG.27 PSIG.29 U4.1 U5.2 | length 45
  Top Layer w1.016: U4.1@36.957,76.107 37.878,75.186 C25.2@41.275,75.186
  Top Layer w1.27: U5.2@35.306,53.34 40.769,53.34 C29.1@41.275,53.846
  Top Layer w2.54: U4.1@36.957,76.107 PSIG.29@36.957,83.185 PSIG.27@36.957,85.725
  Bottom Layer w1.27: U5.2@35.306,53.34 36.795,54.829 36.795,56.497 35.399,57.893 35.399,73.955 37.136,75.692 U4.1@37.338,75.692
LINA: PSIG.2 R56.1 R57.1 | length 19.9
  Top Layer w0.305: R57.1@52.705,118.11 52.705,118.237 53.472,119.004 53.49,119.004 54.485,120 R56.1@54.485,120.132
  Top Layer w0.508: PSIG.2@39.497,118.745 42.545,121.793 53.077,121.793 54.485,120.385 R56.1@54.485,120.132
LINB: PSIG.12 R60.1 R61.1 | length 27.5
  Top Layer w0.305: R61.1@52.704,85.852 52.704,85.994 54.484,87.774 R60.1@54.484,87.884
  Top Layer w0.508: PSIG.12@39.497,106.045 40.132,106.045 54.484,91.693 R60.1@54.484,87.884
LINC: PSIG.22 R64.1 R65.1 | length 48.1
  Top Layer w0.305: R65.1@52.704,53.721 52.704,53.863 54.484,55.643 R64.1@54.484,55.753
  Top Layer w0.508: PSIG.22@39.497,93.345 43.18,89.662 43.18,82.423 45.593,80.01 45.593,63.119 48.387,60.325 50.927,60.325 54.484,56.768 R64.1@54.484,55.753
MITTEL: R74.1 R75.1 R76.1 U6.4 U6.6 U6.8 | length 31.8
  Top Layer w0.305: U6.6@35.7,34.163 34.671,34.163 34.163,34.671 34.163,36.195 34.671,36.703 U6.4@35.7,36.703 36.957,36.703 38.608,35.052 38.608,33.274 38.989,32.893 U6.8@40.5,32.893 41.897,31.496 43.831,31.496 v1(44.322,31.987)
  Top Layer w0.508: v1(44.322,31.987) v1(44.322,37.194) v1(44.322,42.274)
  Bottom Layer w0.508: R76.1@44.319,40.75 44.319,42.271 v1(44.322,42.274) ; R74.1@44.32,30.59 44.322,30.592 v1(44.322,31.987) ; R75.1@44.321,35.67 44.322,35.671 v1(44.322,37.194)
NetC1_2: C1.2 U1.16 | length 3.9
  Top Layer w0.635: U1.16@62.865,116.213 63.881,117.229 63.881,119.155 C1.2@63.529,119.507
NetC5_2: C5.2 R2.2 U1.5 | length 8.1
  Top Layer w0.508: U1.5@57.015,111.133 58.666,111.133 v1(58.674,111.125)
  Bottom Layer w0.508: C5.2@54.485,108.585 R2.2@54.485,110.617 54.993,111.125 v1(58.674,111.125)
NetC6_1: C6.1 R3.2 U1.10 | length 7.6
  Top Layer w0.305: U1.10@62.865,108.593 63.492,108.593 66.42,105.665 C6.1@66.42,104.902
  Top Layer w0.508: R3.2@66.419,102.87 66.42,102.871 C6.1@66.42,104.902
NetC7_1: C7.1 R5.2 R6.1 R7.2 U1.9 | length 8.4
  Top Layer w0.508: C7.1@61.087,100.711 61.089,100.713 R7.2@61.089,102.87 61.087,102.872 R6.1@61.087,104.902 R5.2@62.863,104.902 62.863,107.321 U1.9@62.865,107.323
NetC8_1: C8.1 R16.1 R54.2 U1.7 | length 12
  Top Layer w0.305: R16.1@55.751,100.711 55.751,100.853 R54.2@57.531,102.633
  Top Layer w0.508: C8.1@53.848,100.204 54.355,100.711 R16.1@55.751,100.711 ; U1.7@57.015,108.593 57.65,108.593 58.412,107.831 58.412,106.418 57.531,105.537 R54.2@57.531,102.743 R54.2@57.531,102.633
NetC8_2: C8.2 R8.2 R9.2 U1.6 | length 25
  Top Layer w0.508: C8.2@53.848,98.424 53.848,98.298 54.864,97.282 56.514,97.282 57.531,98.299 R9.2@57.531,98.552 R8.2@59.307,98.552 59.307,98.046 v1(60.071,97.282) ; U1.6@57.015,109.863 58.158,109.863 v1(58.674,109.347)
  Bottom Layer w0.508: v1(58.674,109.347) 62.357,105.664 62.357,98.933 60.706,97.282 v1(60.071,97.282)
NetC12_2: C12.2 R18.2 U2.5 | length 7.9
  Top Layer w0.508: U2.5@56.914,78.875 v1(58.539,78.875)
  Bottom Layer w0.508: C12.2@54.483,76.327 R18.2@54.483,78.359 54.999,78.875 v1(58.539,78.875)
NetC13_2: C13.2 U2.16 | length 3.8
  Top Layer w0.635: U2.16@62.764,83.955 63.754,84.945 63.754,86.923 C13.2@63.428,87.249
NetC14_1: C14.1 R23.2 U2.10 | length 7.6
  Top Layer w0.305: U2.10@62.764,76.335 63.619,76.335 66.42,73.534 C14.1@66.42,72.771 ; R23.2@66.419,70.739 R23.2@66.42,70.74
  Top Layer w0.508: R23.2@66.42,70.74 C14.1@66.42,72.771
NetC15_1: C15.1 R24.1 R25.2 R26.2 U2.9 | length 8.2
  Top Layer w0.508: C15.1@61.087,68.707 C15.1@61.087,68.707 R26.2@61.088,70.739 R24.1@61.088,72.771 R25.2@62.863,72.771 62.764,72.87 U2.9@62.764,75.065
NetC16_1: C16.1 R32.1 R53.2 U2.7 | length 11.6
  Top Layer w0.305: R32.1@55.751,68.707 55.751,68.817 57.531,70.597 R53.2@57.531,70.739
  Top Layer w0.508: C16.1@53.848,68.327 54.228,68.707 R32.1@55.751,68.707 ; U2.7@56.914,76.335 57.523,76.335 58.247,75.611 58.247,73.868 57.531,73.152 R53.2@57.531,70.739
NetC16_2: C16.2 R30.2 R31.2 U2.6 | length 25
  Top Layer w0.508: C16.2@53.848,66.547 54.663,65.732 54.663,65.73 54.961,65.432 54.963,65.432 54.99,65.405 56.642,65.405 57.531,66.294 R31.2@57.531,66.675 R30.2@59.307,66.675 59.307,66.169 v1(60.198,65.278) ; U2.6@56.914,77.605 58.158,77.605 v1(58.547,77.216)
  Bottom Layer w0.508: v1(58.547,77.216) 62.23,73.533 62.23,66.548 60.96,65.278 v1(60.198,65.278)
NetC20_2: C20.2 R34.2 U3.5 | length 8.1
  Top Layer w0.508: U3.5@56.828,46.744 56.963,46.609 v1(58.547,46.609)
  Bottom Layer w0.508: C20.2@54.484,44.069 R34.2@54.484,46.101 54.992,46.609 v1(58.547,46.609)
NetC21_2: C21.2 U3.16 | length 3.8
  Top Layer w0.635: U3.16@62.678,51.824 63.627,52.773 63.627,54.833 C21.2@63.342,55.118
NetC22_1: C22.1 R39.2 U3.10 | length 7.7
  Top Layer w0.305: U3.10@62.678,44.204 63.889,44.204 65.581,42.512 66.419,41.673 C22.1@66.419,40.767
  Top Layer w0.508: C22.1@66.419,40.767 66.419,38.737 R39.2@66.421,38.735
NetC23_1: C23.1 R40.1 R41.2 R42.2 U3.9 | length 8.1
  Top Layer w0.508: C23.1@61.087,36.703 C23.1@61.087,36.703 R40.1@61.088,40.767 R41.2@62.863,40.767 62.678,40.952 U3.9@62.678,42.934
NetC24_1: C24.1 R47.1 R55.2 U3.7 | length 11.4
  Top Layer w0.305: R47.1@55.751,36.703 55.751,36.845 57.531,38.625 R55.2@57.531,38.735
  Top Layer w0.508: C24.1@53.848,36.324 54.227,36.703 R47.1@55.751,36.703 ; U3.7@56.828,44.204 57.396,44.204 58.161,43.439 58.161,39.619 57.531,38.989 R55.2@57.531,38.735
NetC24_2: C24.2 R46.2 R48.2 U3.6 | length 22.9
  Top Layer w0.508: C24.2@53.848,34.544 53.848,34.417 54.864,33.401 56.515,33.401 57.532,34.418 R48.2@57.532,34.671 R46.2@59.307,34.671 59.309,34.669 v1(59.309,33.401) ; U3.6@56.828,45.474 57.904,45.474 v1(58.42,44.958)
  Bottom Layer w0.508: v1(58.42,44.958) 60.833,42.545 60.833,34.925 v1(59.309,33.401)
NetC27_2: C27.2 C28.1 | length 20.7
  Top Layer w2.54: C27.2@113.538,85.504 113.538,64.944 C28.1@113.665,64.817
NetD1_1: D1.1 R11.1 | length 1.8
  Top Layer w0.635: R11.1@66.574,117.348 D1.1@66.574,119.126
NetD1_2: D1.2 Q1.G R10.1 | length 8.5
  Top Layer w0.635: D1.2@69.824,119.126 69.469,118.771 69.469,117.348 R10.1@69.215,117.094 72.263,117.094 73.279,118.11 Q1.G@75.024,118.11
NetD2_1: D2.1 R12.2 U1.11 | length 6.8
  Top Layer w0.635: U1.11@62.865,109.863 66.794,109.863 R12.2@67.183,109.474 67.183,108.204 66.574,107.595 D2.1@66.574,107.442
NetD2_2: D2.2 R13.2 | length 2.3
  Top Layer w0.635: R13.2@69.215,109.473 69.824,108.864 D2.2@69.824,107.442
NetD3_1: D3.1 R20.1 | length 2.3
  Top Layer w0.508: D3.1@66.447,86.995 66.447,85.574 R20.1@67.056,84.965
NetD3_2: D3.2 Q3.G R19.1 | length 8.2
  Top Layer w0.635: R19.1@69.088,84.965 R19.1@69.34,85.217 ; D3.2@69.697,86.995 69.697,85.574 R19.1@69.34,85.217 ; Q3.G@75.024,85.725 74.516,85.217 R19.1@69.34,85.217
NetD4_1: D4.1 R21.2 U2.11 | length 6.7
  Top Layer w0.635: U2.11@62.764,77.605 66.794,77.605 R21.2@67.056,77.343 67.056,75.894 D4.1@66.473,75.311
NetD4_2: D4.2 R22.2 | length 2.3
  Top Layer w0.635: R22.2@69.114,77.341 69.62,76.835 69.62,75.414 D4.2@69.723,75.311
NetD5_1: D5.1 R36.1 | length 2.4
  Top Layer w0.508: D5.1@66.32,54.991 66.32,53.443 R36.1@66.929,52.834
NetD5_2: D5.2 Q5.G R35.1 | length 8.7
  Top Layer w0.635: D5.2@69.57,54.991 68.961,54.382 R35.1@68.961,52.834 74.518,52.834 Q5.G@75.024,53.34
NetD6_1: D6.1 R37.2 U3.11 | length 6.6
  Top Layer w0.635: U3.11@62.678,45.474 66.667,45.474 R37.2@66.929,45.212 66.929,43.722 D6.1@66.387,43.18
NetD6_2: D6.2 R38.2 | length 2.3
  Top Layer w0.635: R38.2@69.028,45.21 69.637,44.601 D6.2@69.637,43.18
NetQ2_G: Q2.G R12.1 R13.1 | length 13.5
  Top Layer w0.635: R12.1@67.183,111.254 69.214,111.254 R13.1@69.215,111.253 69.595,111.253 70.993,109.855 70.993,106.045 74.041,102.997 Q2.G@75.024,102.997
NetQ2_S: Q2.S R3.1 R4.1 R5.1 R14.1 R15.1 | length 15
  Top Layer w0.508: 64.643,96.647 R5.1@64.643,104.902 ; 68.199,96.139 R3.1@68.199,102.87
NetQ4_G: Q4.G R21.1 R22.1 | length 14
  Top Layer w0.635: R21.1@67.056,79.123 69.112,79.123 R22.1@69.114,79.121 69.457,79.121 70.086,78.493 70.739,77.839 70.739,73.533 73.66,70.612 Q4.G@75.024,70.612
NetQ4_S: Q4.S R23.1 R25.1 R27.1 R28.1 R29.1 | length 17.2
  Top Layer w0.305: 70.105,66.734 R27.1@71.12,65.719
  Top Layer w0.508: 64.643,64.135 R25.1@64.643,72.771 ; 68.199,63.627 R23.1@68.199,70.739
NetQ6_G: Q6.G R37.1 R38.1 | length 14.4
  Top Layer w0.635: R37.1@66.929,46.992 69.026,46.992 R38.1@69.028,46.99 69.371,46.99 70.866,45.495 70.866,40.894 73.533,38.227 Q6.G@75.024,38.227
NetQ6_S: Q6.S R39.1 R41.1 R43.1 R44.1 R45.1 | length 8.3
  Top Layer w0.508: 64.643,35.179 R41.1@64.643,40.767 ; 68.201,36.066 R39.1@68.201,38.735
NetR9_1: R9.1 R16.2 | length 2.9
  Top Layer w0.305: R9.1@55.751,98.552 55.751,98.804 57.531,100.584 R16.2@57.531,100.711
NetR10_2: R10.2 R11.2 U1.15 | length 6.5
  Top Layer w0.635: U1.15@62.865,114.943 68.844,114.943 R10.2@69.215,115.314
NetR19_2: R19.2 R20.2 U2.15 | length 6.5
  Top Layer w0.635: U2.15@62.764,82.685 66.556,82.685 R20.2@67.056,83.185 R19.2@69.088,83.185
NetR31_1: R31.1 R32.2 | length 2.8
  Top Layer w0.305: R31.1@55.751,66.675 55.751,66.785 57.531,68.565 R32.2@57.531,68.707
NetR35_2: R35.2 R36.2 U3.15 | length 6.5
  Top Layer w0.635: U3.15@62.678,50.554 68.461,50.554 R35.2@68.961,51.054
NetR47_2: R47.2 R48.1 | length 2.8
  Top Layer w0.305: R48.1@55.752,34.671 55.752,34.781 57.531,36.56 R47.2@57.531,36.703
NetR57_2: R57.2 U1.1 | length 3.3
  Top Layer w0.508: R57.2@54.485,118.11 56.382,116.213 U1.1@57.015,116.213
NetR58_2: R58.2 U1.3 | length 8.1
  Top Layer w0.508: R58.2@49.53,114.935 49.575,114.935 50.618,113.892 57.015,113.892 U1.3@57.015,113.673
NetR61_2: R61.2 U2.1 | length 3.2
  Top Layer w0.508: R61.2@54.484,85.852 56.381,83.955 U2.1@56.914,83.955
NetR62_2: R62.2 U2.3 | length 7.9
  Top Layer w0.508: R62.2@49.53,82.55 51.754,82.55 52.262,82.042 54.866,82.042 55.493,81.415 U2.3@56.914,81.415
NetR65_2: R65.2 U3.1 | length 3.1
  Top Layer w0.508: R65.2@54.484,53.721 56.381,51.824 U3.1@56.828,51.824
NetR66_2: R66.2 U3.3 | length 7.8
  Top Layer w0.508: R66.2@49.53,50.546 51.627,50.546 52.381,49.792 54.858,49.792 55.366,49.284 U3.3@56.828,49.284